# EAGLE board Senser_ver.1 (EAGLE 6.6.0)
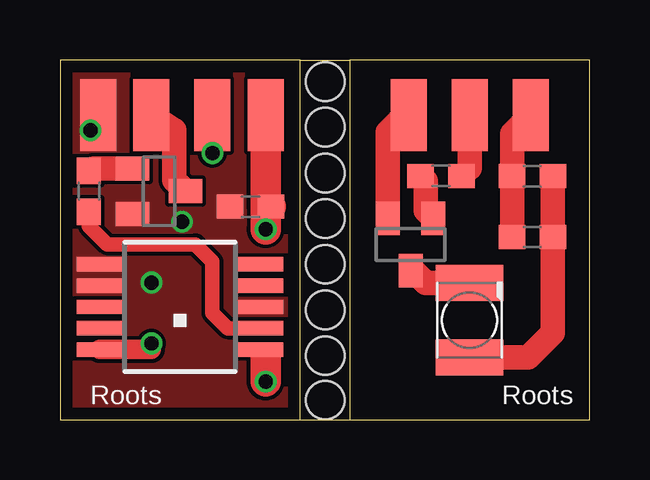
[diagram p0: board, top side]
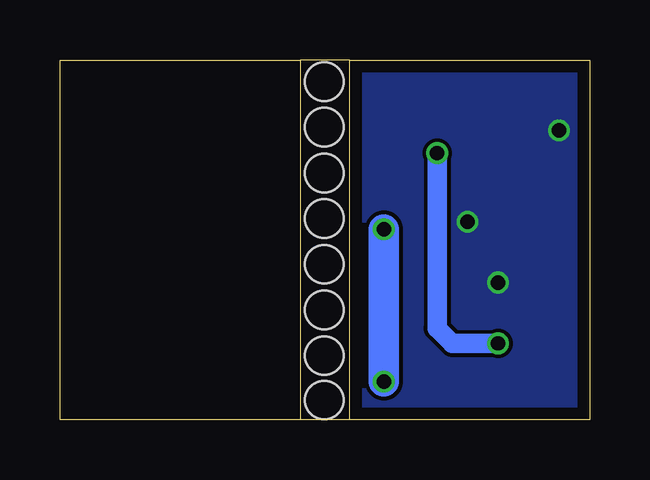
[diagram p1: board, bottom side, seen from below]

Size 22.07 x 15 mm. Coordinates in mm from the lower left corner, seen from the top.
Outline: 10,0 0,0 0,15 10,15
Outline: 10,0 10,15
Outline: 12.06,0 22.07,0 22.07,15 12.06,15
Outline: 12.06,15 12.06,0
Outline: 10,0 12.06,0
Outline: 10,15 12.06,15
Copper layers (1*16): Top 0.035mm / dielectric 1.6mm / Bottom 0.035mm
Design rules "Elecrow_2-layer_PCB_eagle_rule": minimum track width 6mil, minimum drill 12mil, track to track 6mil, track to pad 6mil, pad to pad 6mil, via to via 8mil, smd to smd 0mil, copper to edge 20mil, drill to drill 10mil, minimum pad ring 6mil, minimum via ring 6mil, stop-mask expansion 0mil, vias tented up to drill 100mil, thermal gap 10mil
Holes 1.6 mm at 11.05,0.81 11.05,2.67 11.05,4.57 11.05,6.48 11.05,8.38 11.05,10.29 11.05,12.19 11.05,14.1

## Footprints (pad centres in the part's own frame; a part is rotated, then mirrored left to right if it is on the bottom)
C1608 = smd 1.1 x 1: 1 -0.85,0; 2 0.85,0
PAD = smd 1.5 x 3: 2 0,-0.635
KA-3528ASYC = smd 1.5 x 2.8: A -1.55,0; C 1.55,0
SOT23 = smd 1 x 1.4: 1 -0.95,-1.1; 2 0.95,-1.1; 3 0,1.1
R1608 = smd 1.1 x 1: 1 -0.85,0; 2 0.85,0
S8119 = smd 0.6 x 1.9: 1 -1.78,-3.35; 2 -0.89,-3.35; 3 0,-3.35; 4 0.89,-3.35; 5 1.78,-3.35; 6 1.78,3.35; 7 0.89,3.35; 8 0,3.35; 9 -0.89,3.35; 10 -1.78,3.35
15-91-03S = smd 1.5 x 3: 1 -2.54,-0.635; 2 0,-0.635; 3 2.54,-0.635

## Placement (x,y rotation side)
C1  [C1608]  7.94,8.89 180 top
GND  PAD  [PAD]  1.59,13.34 0 top
LED  PAD  [PAD]  6.35,13.34 0 top
LED1  [KA-3528ASYC]  17.07,4.14 90 top
OUT  PAD  [PAD]  3.81,13.34 0 top
Q1  2SC1815SOT  [SOT23]  4.13,9.53 270 top
Q2  2SC1815SOT  [SOT23]  14.61,7.3 180 top
R1  [R1608]  1.21,9.53 90 top
R2  [R1608]  19.68,7.62 180 top
R3  [R1608]  19.68,10.16 180 top
R4  [R1608]  15.88,10.16 0 top
U$1  S8119  [S8119]  5,4.7 90 top
VCC  PAD  [PAD]  8.57,13.34 0 top
X1  22-23-203115-91-03S  [15-91-03S]  17.07,12.06 180 top

## Library data of the parts
C1 = Capacitor
GND LED OUT VCC = Pinhead
LED1 = LED
Q1 Q2 = Transistor_NPN
R1-R4 = Registor
U$1 = PhotoIC
X1 = Con-molex

## Nets
+5V: C1.1 U$1.1 VCC.2
+5V1: R2.2 R3.2 X1.1
GND: C1.2 GND.2 Q1.2 U$1.3 U$1.6 U$1.7
GND1: Q2.2 X1.3
LED: LED.2 U$1.10
N$1: R1.1 U$1.2
N$2: Q1.1 R1.2
N$3: OUT.2 Q1.3
N$4: LED1.C Q2.3
N$5: LED1.A R2.1 R3.1
N$6: R4.2 X1.2
N$7: Q2.1 R4.1

## Tracks (layer width: path | path; a pad name or v marks a point on that pad's centre or on a via)
+5V  (via drill 0.6)
  Top 0.406: U$1.1 8.57,2.92 8.57,2.54
  Top 1.27: 8.57,8.89 VCC.2 | C1.1 8.57,8.89 | 8.57,8.89 v8.57,7.94 | v8.57,1.59 8.57,2.54
  Bottom 1.27: v8.57,7.94 v8.57,1.59
+5V1
  Top 1.016: R2.2 R3.2 18.84,11.93 X1.1
GND  (via drill 0.6)
  other vias: 1.27,12.06 5.08,8.26 3.81,5.71
  pour Bottom (no thermals): 0,15.24 0,0 10.16,0 10.16,15.24
  pour Top (no thermals): 0,15.24 0,0 10.16,0 10.16,15.24
GND1
  Top 1.016: X1.3 14.36,12.7 13.65,11.99 Q2.2
LED  (via drill 0.6)
  Top 0.813: LED.2 v6.35,11.11 | U$1.10 3.81,2.92 v3.81,3.17
  Bottom 0.813: v6.35,11.11 6.35,3.81 5.71,3.17 v3.81,3.17
N$1
  Top 0.61: R1.1 1.21,8.07 1.97,7.3 5.64,7.3 6.35,6.59 6.35,4.45 6.99,3.81 U$1.2
N$2
  Top 1.016: Q1.1 1.41,10.47 R1.2
N$3
  Top 1.016: OUT.2 4.76,12.06 4.76,9.99 Q1.3
N$4
  Top 1.016: LED1.C 15.24,5.69 14.61,6.33 Q2.3
N$5
  Top 1.016: R3.1 R2.1 20.54,3.62 19.5,2.59 LED1.A
N$6
  Top 1.016: R4.2 17.07,10.5 X1.2
N$7
  Top 1.016: R4.1 15.24,9.95 15.24,8.72 Q2.1

## Text on the board
tNames: Roots | Roots